# EAGLE board stm32f103c8t6_tft_v03 (EAGLE 6.6.0)
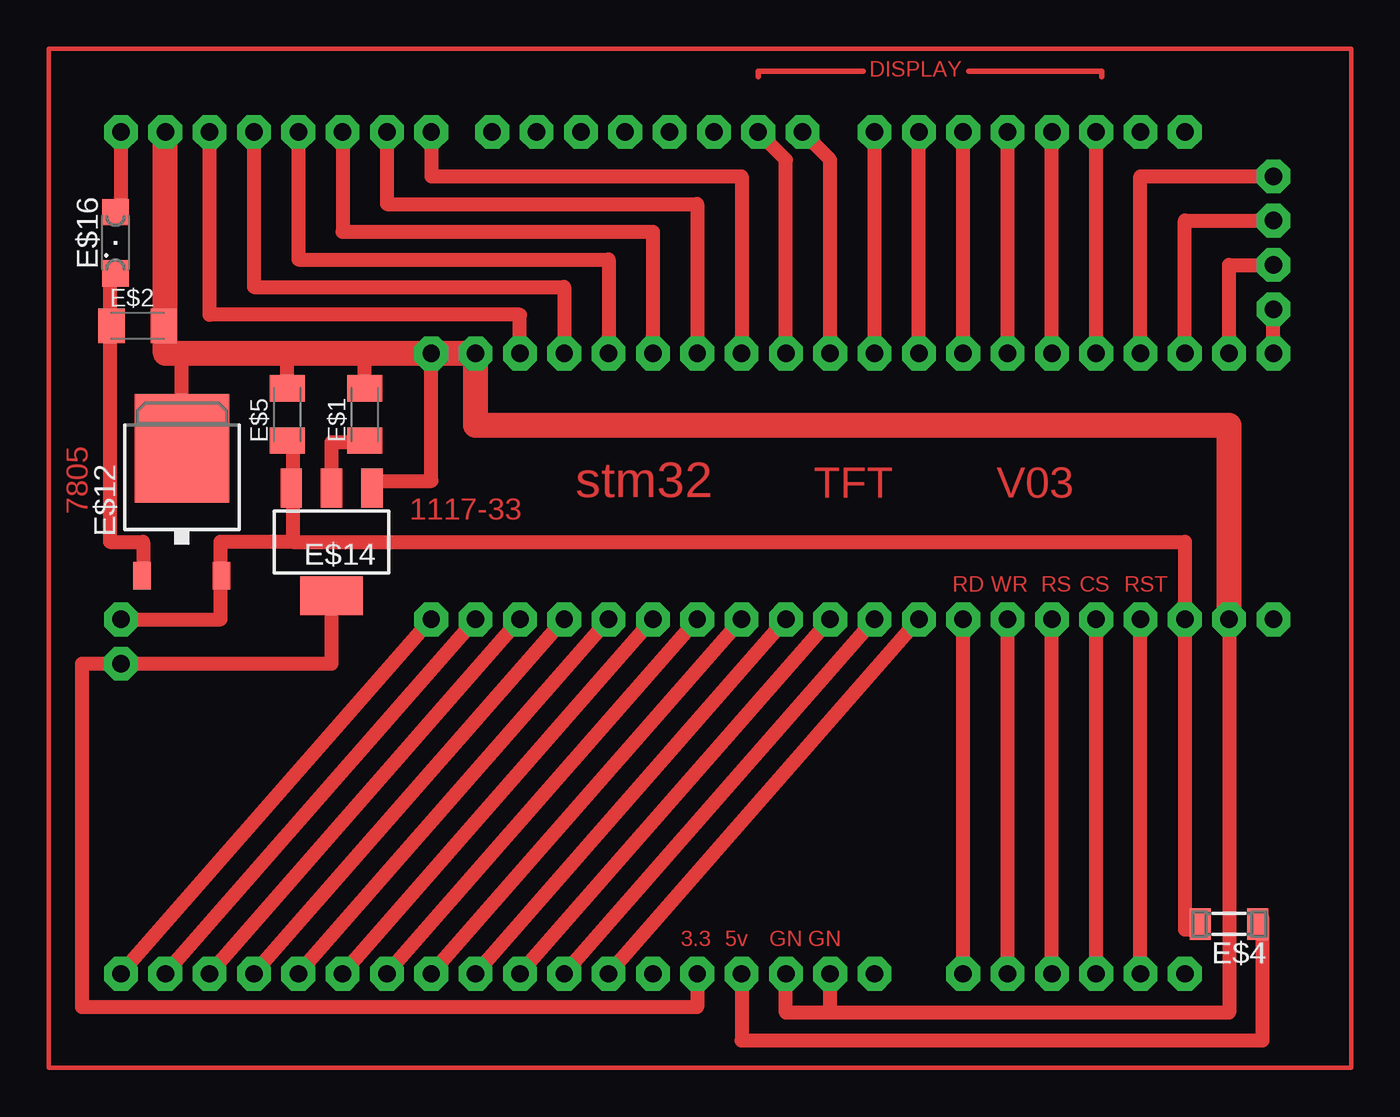
[diagram p0: board, top side]
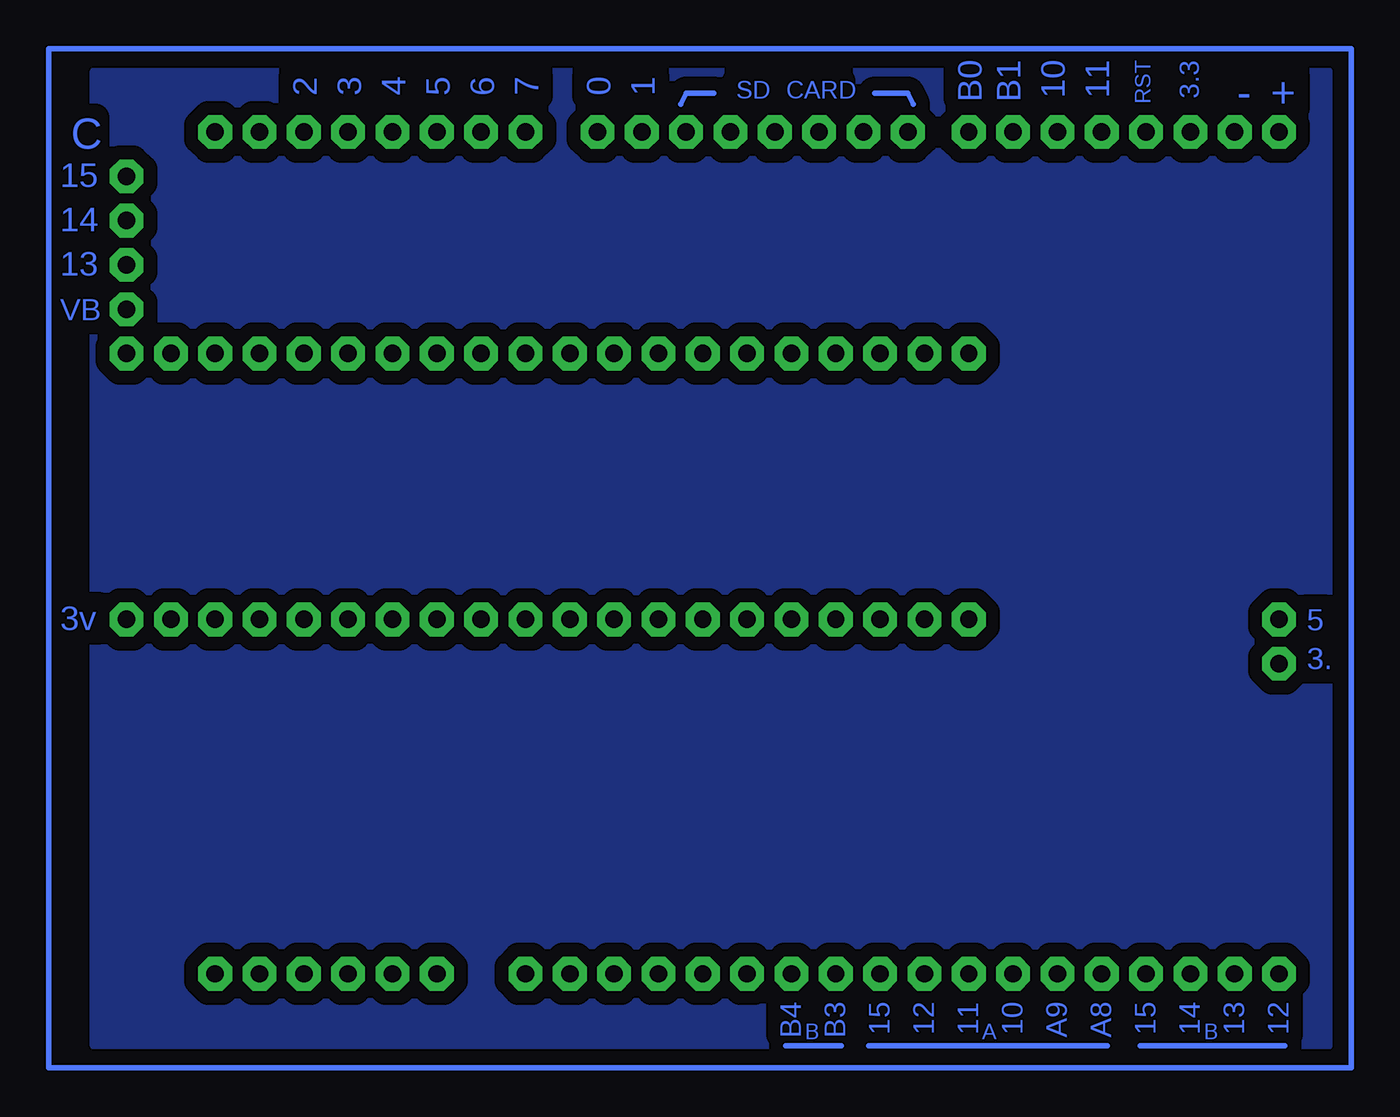
[diagram p1: board, bottom side, seen from below]

No outline drawn. Coordinates in mm, seen from the top.
Copper layers (1*16): Top 0.035mm / dielectric 1.5mm / Bottom 0.035mm
Design rules "default": minimum track width 10mil, minimum drill 24mil, track to track 8mil, track to pad 8mil, pad to pad 8mil, via to via 8mil, smd to smd 8mil, copper to edge 40mil, drill to drill 8mil, minimum pad ring 10mil, minimum via ring 8mil, stop-mask expansion 4mil, vias tented up to drill 0mil, thermal gap 10mil

## Footprints (pad centres in the part's own frame; a part is rotated, then mirrored left to right if it is on the bottom)
C1206K = smd 1.5 x 2: 1 -1.5,0; 2 1.5,0
SM-1206 = smd 1.2 x 1.8: 1 -1.65,0; 2 1.65,0
TO252 = smd 1 x 1.6: 1 -2.28,-4.8; 2 2.28,-4.8 | smd 5.4 x 6.2: 3 0,2.5
SOT223 = smd 1.219 x 2.235: 1 -2.311,-3.099; 2 0,-3.099; 3 2.311,-3.099 | smd 3.6 x 2.2: 4 0,3.099
SML1206 = smd 1.5 x 1.5: A 1.75,0; C -1.75,0

## Placement (x,y rotation side)
E$1  [C1206K]  18.1,37.47 90 top
E$2  [C1206K]  5.08,42.55 0 top
E$4  [SM-1206]  67.63,8.26 180 top
E$5  [C1206K]  13.65,37.47 90 top
E$12  [TO252]  7.62,33.02 0 top
E$14  [SOT223]  16.19,30.16 180 top
E$16  [SML1206]  3.81,47.31 90 top

## Library data of the parts
E$1 E$2 E$5 E$12 = adafruit
E$4 = inductor-neosid
E$14 = transistor-pnp
E$16 = led

## Tracks (layer width: path | path; a pad name or v marks a point on that pad's centre or on a via)
S$1  (via drill 1 pad 1.93)
  Top 0.813: v60.01,40.96 v60.01,53.66
S$2  (via drill 1 pad 1.93)
  Top 0.813: v57.47,40.96 v57.47,53.66
S$3  (via drill 1 pad 1.93)
  Top 0.813: v54.93,40.96 v54.93,53.66
S$4  (via drill 1 pad 1.93)
  Top 0.813: v49.85,40.96 v49.85,53.66
S$5  (via drill 1 pad 1.93)
  Top 0.813: v47.31,40.96 v47.31,53.66
S$6  (via drill 1 pad 1.93)
  Top 0.813: v44.77,40.96 44.77,52.07 v43.18,53.66
S$7
  Top 0.813: 62.55,5.4 62.55,25.72
S$8
  Top 0.813: 60.01,5.4 60.01,25.72
S$9
  Top 0.813: 57.47,5.4 57.47,25.72
S$10
  Top 0.813: 54.93,5.4 54.93,25.72
S$11
  Top 0.813: 52.39,5.4 52.39,25.72
S$12  (via drill 1 pad 1.93)
  Top 0.813: 16.19,27.3 16.19,23.18 v4.13,23.18 1.91,23.18 1.91,3.49 37.15,3.49 v37.15,5.4
S$13
  Top 0.813: 3.49,45.4 3.49,30.16 5.4,30.16 5.4,27.94
S$14  (via drill 1 pad 1.93)
  Top 0.813: v42.23,40.96 42.23,52.07 v40.64,53.66
S$15  (via drill 1 pad 1.93)
  other vias: 65.09,53.66
S$16
  Top 0.813: 16.19,33.34 16.19,35.88 18.1,35.88
S$17  (via drill 1 pad 1.93)
  Top 0.813: 18.41,32.7 18.41,33.66 21.91,33.66 v21.91,40.96 | v67.63,25.72 67.63,3.17 44.77,3.17 | 44.77,3.17 v44.77,5.4 | 44.77,3.17 42.23,3.17 v42.23,5.4 | 13.65,38.73 13.65,40.96 | 18.1,38.73 18.1,40.96
  Top 1.422: v67.63,25.72 67.63,36.83 24.45,36.83 v24.45,40.96 v21.91,40.96 18.1,40.96 13.65,40.96 6.67,40.96 v6.67,53.66
S$18
  Bottom 0.305: 27.3,55.88 25.4,55.88 25.08,55.24
S$19
  Top 0.813: 7.62,36.2 7.62,40.96
S$20
  Bottom 0.305: 36.51,55.88 38.1,55.88 38.42,55.24
S$21  (via drill 1 pad 1.93)
  Top 0.813: v52.39,40.96 v52.39,53.66
S$22  (via drill 1 pad 1.93)
  Top 0.813: v11.75,53.66 11.75,44.77 29.53,44.77 v29.53,40.96
S$23  (via drill 1 pad 1.93)
  Top 0.813: v14.29,53.66 14.29,46.35 32.07,46.35 v32.07,40.96
S$24
  pour Bottom (isolate 0.813): 1.27,1.27 72.07,1.27 72.07,57.15 1.27,57.15
S$25  (via drill 1 pad 1.93)
  Top 0.813: 13.97,30.16 65.09,30.16 v65.09,25.72 65.09,7.94 66.04,7.94 | 13.97,35.88 13.97,30.16 | 13.97,30.16 9.84,30.16 9.84,25.72 v4.13,25.72
S$26
  Bottom 0.305: 74.61,58.42 74.61,0 0,0 0,58.42 74.61,58.42
S$27
  Bottom 0.305: 3.81,1.27 12.06,1.27
S$28
  Bottom 0.305: 29.21,1.27 32.38,1.27
S$29
  Bottom 0.305: 13.97,1.27 27.62,1.27
S$33
  Top 0.305: 40.64,56.83 40.64,57.15 46.67,57.15
S$34  (via drill 1 pad 1.93)
  Top 0.813: v4.13,53.66 4.13,49.21
S$35
  Top 0.305: 52.7,57.15 60.33,57.15 60.33,56.83
S$43
  Top 0.254: 0,0 74.61,0 74.61,58.42 0,58.42 0,0
S$49  (via drill 1 pad 1.93)
  Top 0.813: v16.83,53.66 16.83,47.94 34.61,47.94 v34.61,40.96
S$50  (via drill 1 pad 1.93)
  Top 0.813: v19.37,53.66 19.37,49.53 37.15,49.53 v37.15,40.96
S$51  (via drill 1 pad 1.93)
  Top 0.813: v21.91,53.66 21.91,51.12 39.69,51.12 v39.69,40.96
S$52  (via drill 1 pad 1.93)
  other vias: 25.4,53.66
S$53  (via drill 1 pad 1.93)
  other vias: 27.94,53.66
S$54  (via drill 1 pad 1.93)
  other vias: 30.48,53.66
S$55  (via drill 1 pad 1.93)
  other vias: 33.02,53.66
S$56  (via drill 1 pad 1.93)
  other vias: 35.56,53.66
S$57  (via drill 1 pad 1.93)
  other vias: 38.1,53.66
S$66  (via drill 1 pad 1.93)
  other vias: 62.55,53.66
S$67  (via drill 1 pad 1.93)
  Top 0.813: v39.69,5.4 39.69,1.59 69.53,1.59 69.53,8.57
S$70  (via drill 1 pad 1.93)
  Top 0.813: v70.17,40.96 v70.17,43.5
S$71  (via drill 1 pad 1.93)
  Top 0.813: v26.99,40.96 26.99,43.18 9.21,43.18 v9.21,53.66
S$85  (via drill 1 pad 1.93)
  Top 0.813: v62.55,40.96 62.55,51.12 v70.17,51.12
S$86  (via drill 1 pad 1.93)
  Top 0.813: v65.09,40.96 65.09,48.58 v70.17,48.58
S$87  (via drill 1 pad 1.93)
  Top 0.813: v67.63,40.96 67.63,46.04 v70.17,46.04
S$99  (via drill 1 pad 1.93)
  Top 0.813: v29.53,5.4 v47.31,25.72
S$101  (via drill 1 pad 1.93)
  other vias: 52.39,25.72
S$102  (via drill 1 pad 1.93)
  other vias: 54.93,25.72
S$103  (via drill 1 pad 1.93)
  other vias: 57.47,25.72
S$104  (via drill 1 pad 1.93)
  other vias: 60.01,25.72
S$105  (via drill 1 pad 1.93)
  other vias: 62.55,25.72
S$108  (via drill 1 pad 1.93)
  other vias: 54.93,5.4
S$109  (via drill 1 pad 1.93)
  other vias: 65.09,5.4
S$110  (via drill 1 pad 1.93)
  other vias: 62.55,5.4
S$111  (via drill 1 pad 1.93)
  other vias: 60.01,5.4
S$112  (via drill 1 pad 1.93)
  other vias: 57.47,5.4
S$113  (via drill 1 pad 1.93)
  other vias: 52.39,5.4
S$114  (via drill 1 pad 1.93)
  other vias: 47.31,5.4
S$115  (via drill 1 pad 1.93)
  Top 0.813: v24.45,5.4 v42.23,25.72
S$118  (via drill 1 pad 1.93)
  other vias: 34.61,5.4
S$119  (via drill 1 pad 1.93)
  Top 0.813: v32.07,5.4 v49.85,25.72
S$121  (via drill 1 pad 1.93)
  Top 0.813: v26.99,5.4 v44.77,25.72
S$122  (via drill 1 pad 1.93)
  Top 0.813: v4.13,5.4 v21.91,25.72
S$123  (via drill 1 pad 1.93)
  Top 0.813: v6.67,5.4 v24.45,25.72
S$124  (via drill 1 pad 1.93)
  Top 0.813: v9.21,5.4 v26.99,25.72
S$125  (via drill 1 pad 1.93)
  Top 0.813: v11.75,5.4 v29.53,25.72
S$126  (via drill 1 pad 1.93)
  Top 0.813: v14.29,5.4 v32.07,25.72
S$127  (via drill 1 pad 1.93)
  Top 0.813: v16.83,5.4 v34.61,25.72
S$128  (via drill 1 pad 1.93)
  Top 0.813: v19.37,5.4 v37.15,25.72
S$129  (via drill 1 pad 1.93)
  Top 0.813: v21.91,5.4 v39.69,25.72
S$131  (via drill 1 pad 1.93)
  other vias: 70.17,25.72

## Text on the board
Top: DISPLAY | stm32 | TFT | V03 | 7805 | 1117-33 | RD | WR | RS | CS | RST | 3.3 | 5v | GN | GN
Bottom: 3.3 | RST | 11 | 10 | B1 | B0 | + | - | 1 | 0 | 7 | 6 | 5 | 4 | 3 | 2 | CARD | SD | C | 15 | 14 | 13 | VB | 5 | 3v | 3. | 12 | 13 | 14 | 15 | A8 | A9 | 10 | 11 | 12 | 15 | B3 | B4 | B | A | B